# EAGLE board InputBrd (EAGLE 7.6.0)
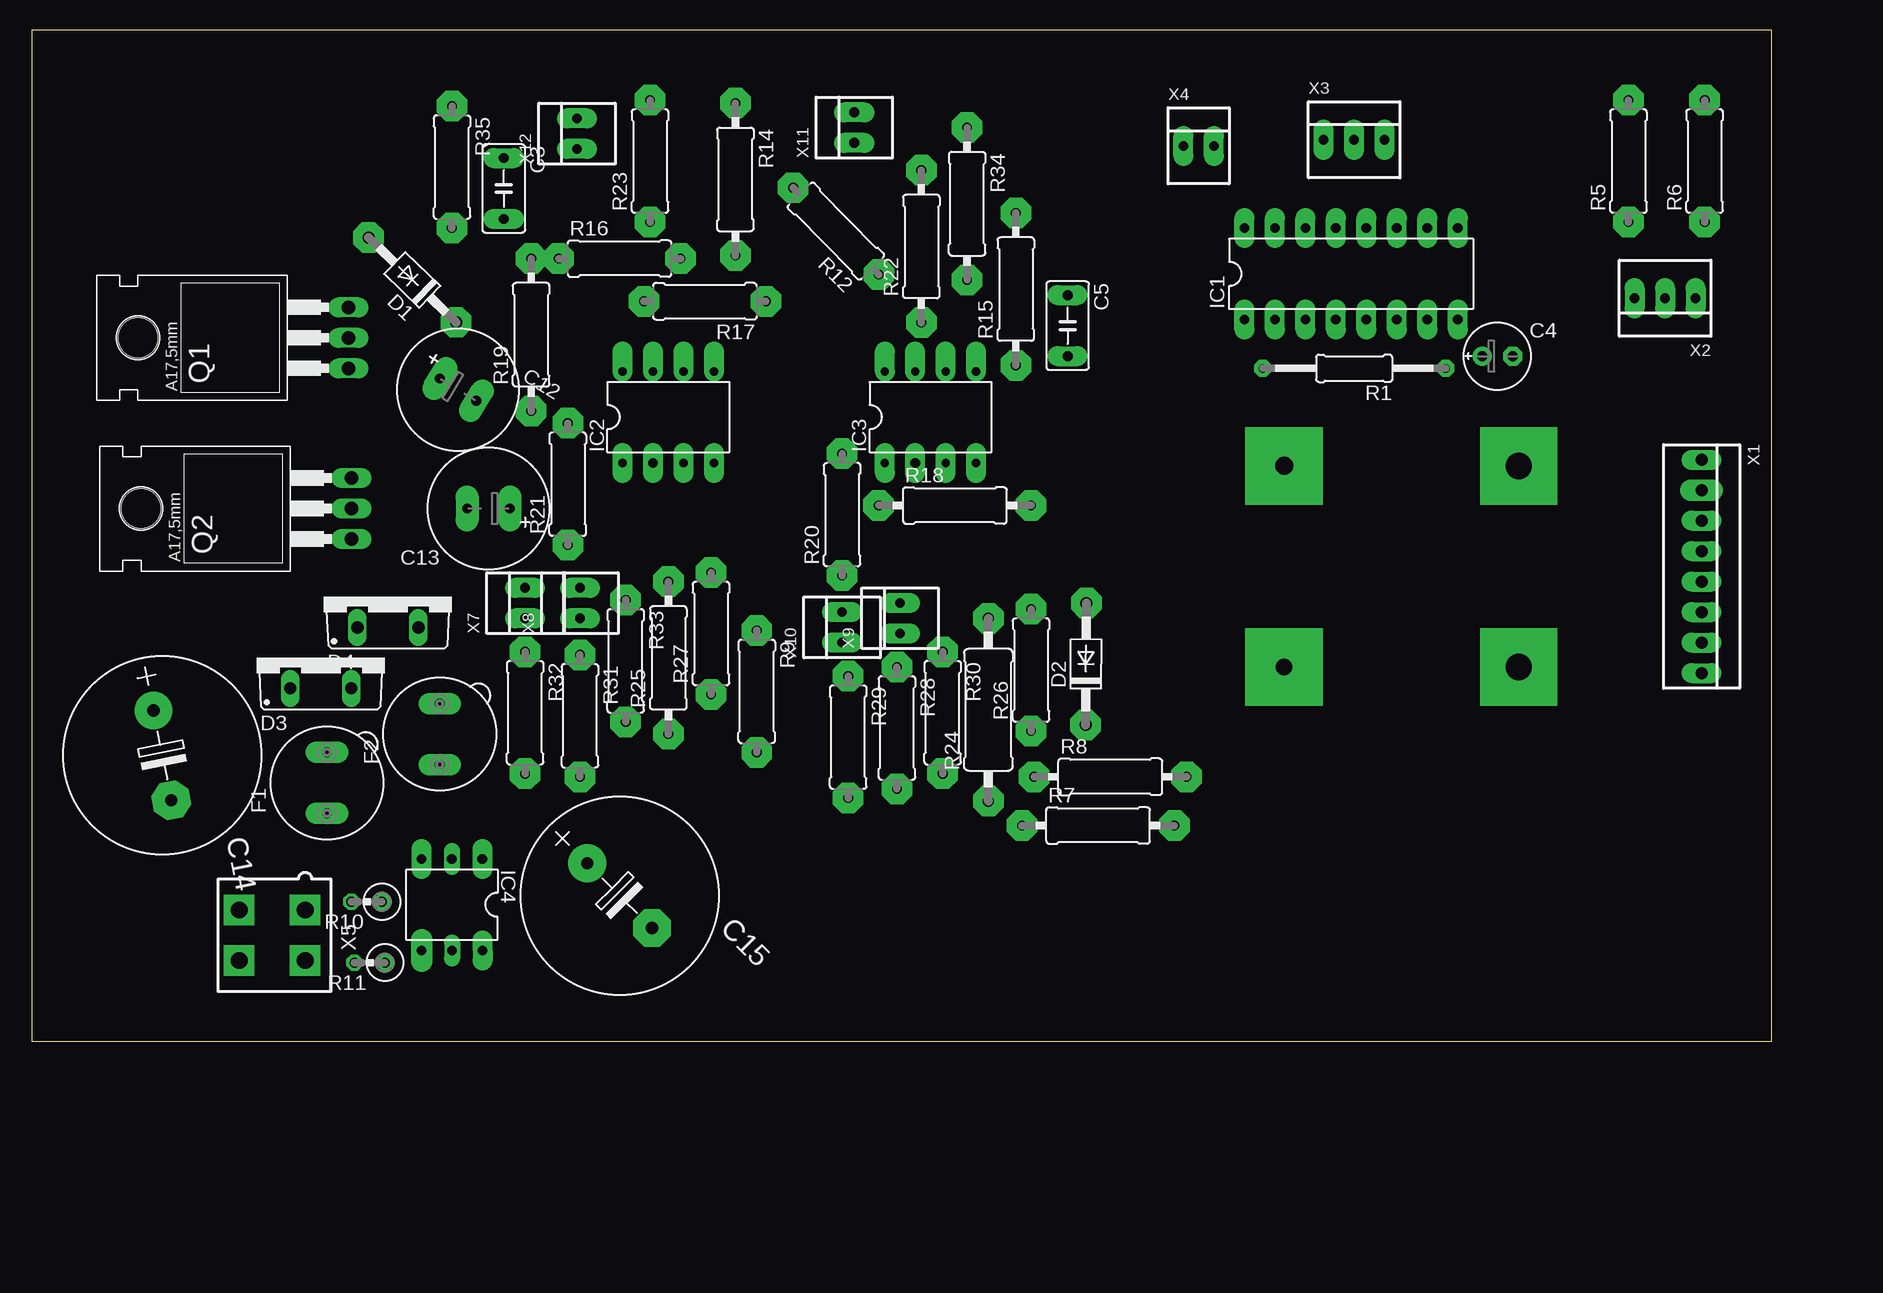
[diagram p0: board, top side]
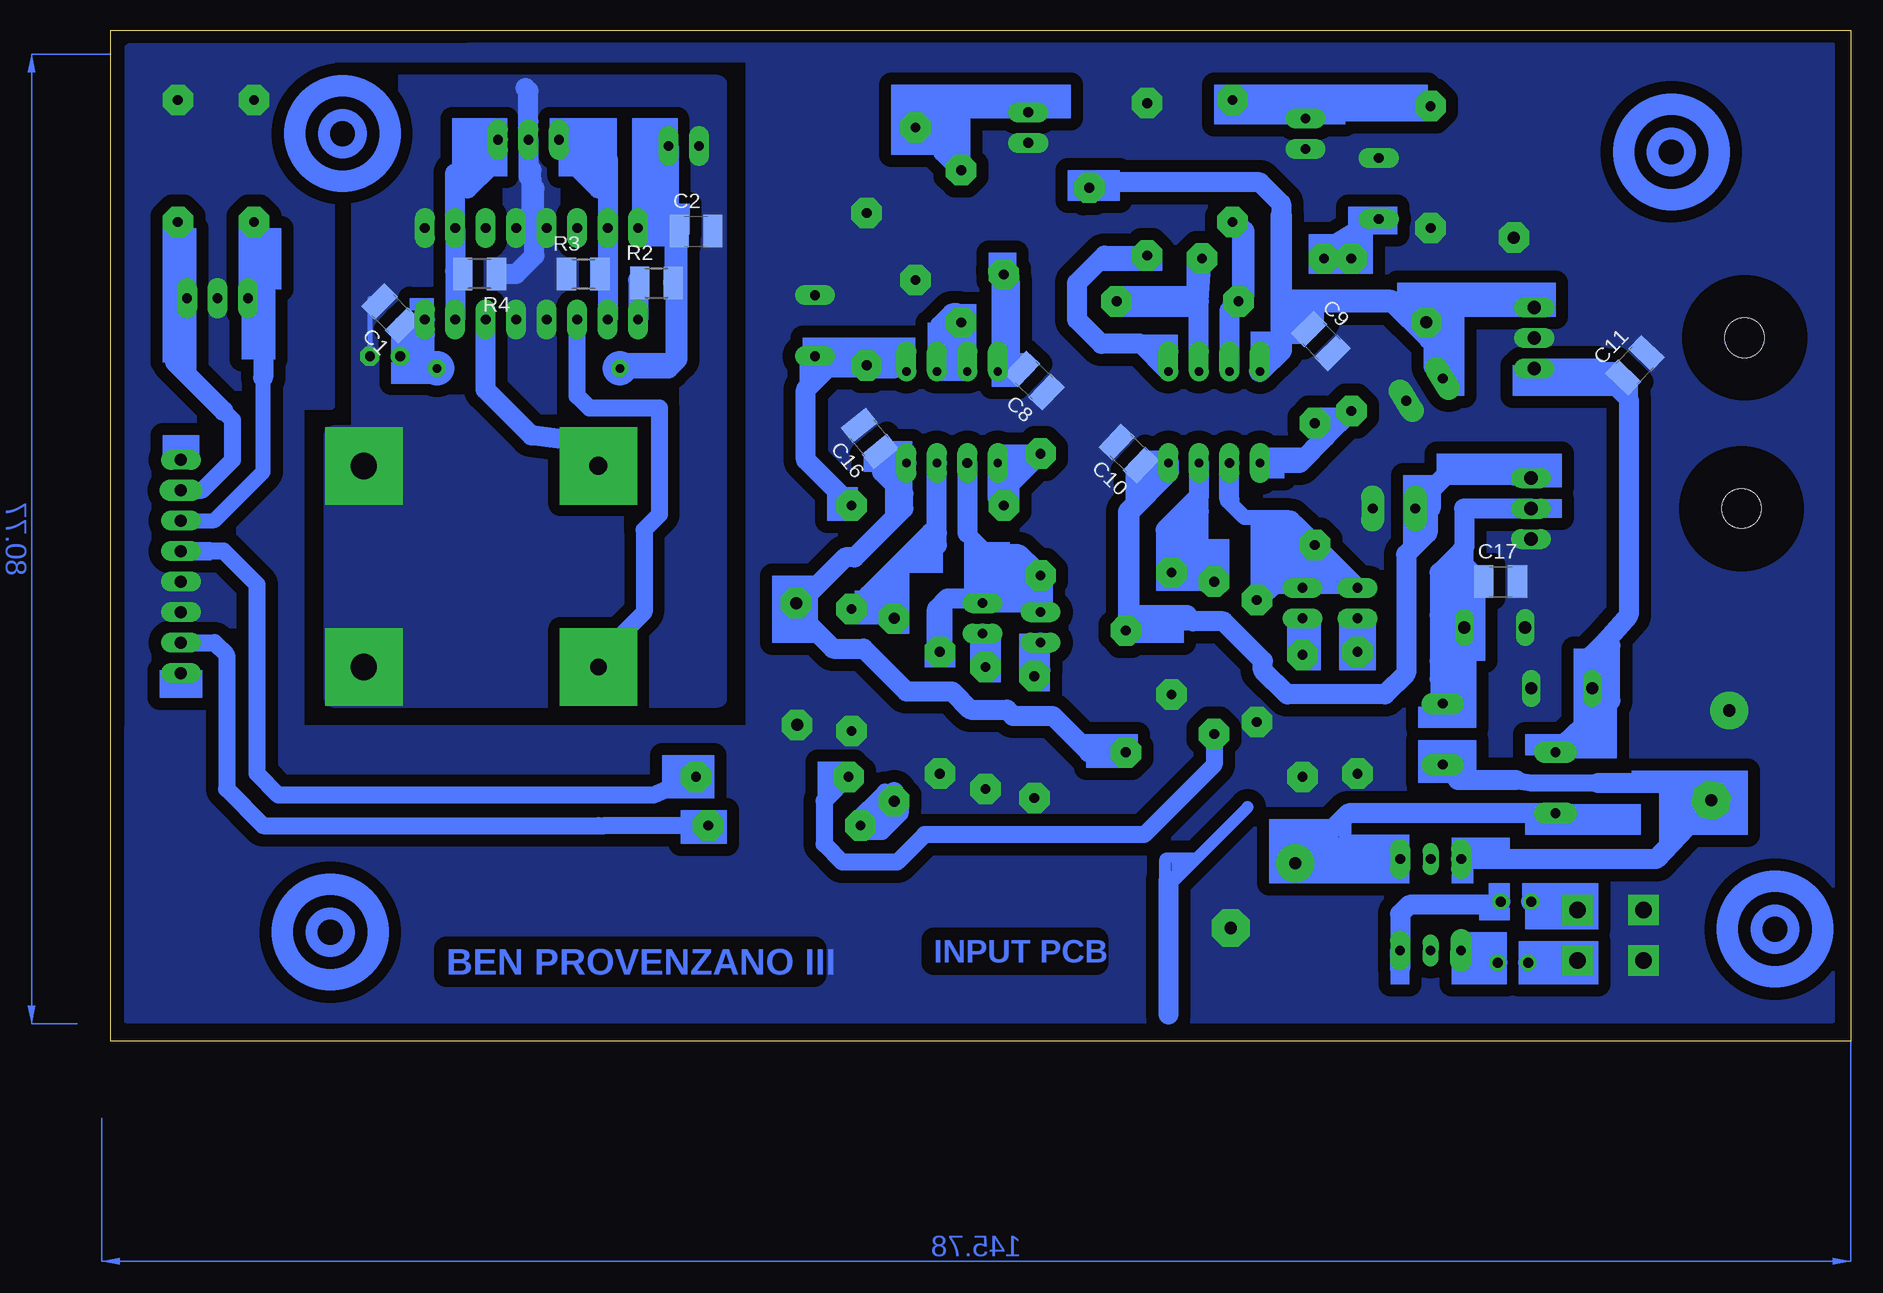
[diagram p1: board, bottom side, seen from below]

Size 145.01 x 84.25 mm. Coordinates in mm from the lower left corner, seen from the top.
Outline: 145.01,84.25 0,84.25 0,0 145.01,0 145.01,84.25
Copper layers (1*16): Top 0.035mm / dielectric 1.5mm / Bottom 0.035mm
Design rules "default": minimum track width 10mil, minimum drill 24mil, track to track 8mil, track to pad 8mil, pad to pad 8mil, via to via 8mil, smd to smd 8mil, copper to edge 40mil, drill to drill 8mil, minimum pad ring 10mil, minimum via ring 8mil, stop-mask expansion 4mil, vias tented up to drill 0mil, thermal gap 10mil

## Footprints (pad centres in the part's own frame; a part is rotated, then mirrored left to right if it is on the bottom)
C1210 = smd 1.6 x 2.7: 1 -1.4,0; 2 1.4,0
C050-035X075 = drill 0.813 pad 1.676 long: 1 -2.54,0; 2 2.54,0
E2,5-6E = drill 0.813 pad 1.575: + -1.27,0 | drill 0.813 pad 1.575 octagon: - 1.27,0
E3,5-10 = drill 0.813 pad 1.93 long: + -1.778,0; - 1.778,0
E7,5-16 = drill 1.016 pad 3.15: + -3.81,0 | drill 1.016 pad 3.15 octagon: - 3.81,0
DO41-10 = drill 1 pad 2.54 octagon: A 5.08,0; C -5.08,0
TO220ACS = drill 1.016 long: A 2.54,-2.54; C -2.54,-2.54
19560 = drill 0.813 pad 1.778 long: 1 -2.54,0; 2 2.54,0
DIL16 = drill 0.813 pad 1.676 long: 1 -8.89,-3.81; 2 -6.35,-3.81; 3 -3.81,-3.81; 4 -1.27,-3.81; 5 1.27,-3.81; 6 3.81,-3.81; 7 6.35,-3.81; 8 8.89,-3.81; 9 8.89,3.81; 10 6.35,3.81; 11 3.81,3.81; 12 1.27,3.81; 13 -1.27,3.81; 14 -3.81,3.81; 15 -6.35,3.81; 16 -8.89,3.81
DIL08 = drill 0.7 pad 1.676 long: 1 -3.81,-3.81; 3 1.27,-3.81; 4 3.81,-3.81 | drill 0.8 pad 1.676 long: 2 -1.27,-3.81 | drill 0.7 pad 1.676 offset: 5 3.81,3.81; 6 1.27,3.81; 7 -1.27,3.81; 8 -3.81,3.81
DIL06 = drill 0.813 pad 1.676 long: 1 -2.54,-3.81; 3 2.54,-3.81; 6 -2.54,3.81 | drill 0.813 long: 2 0,-3.81; 5 0,3.81 | drill 0.813 pad 1.778 long: 4 2.54,3.81
TO220 = drill 1.118 long: 1 -2.54,-6.35; 2 0,-6.35; 3 2.54,-6.35 | hole 3.302: 0,11.176
0207/15 = drill 0.7 pad 1.422 octagon: 1 -7.62,0; 2 7.62,0
R1210 = smd 1.6 x 2.7: 1 -1.4,0; 2 1.4,0
0309/10 = drill 0.813 pad 2.54 octagon: 1 -5.08,0; 2 5.08,0
0309/12 = drill 0.813 pad 2.54 octagon: 1 -6.35,0; 2 6.35,0
0309V = drill 0.813 octagon: 1 -1.27,0; 2 1.27,0
0411/15 = drill 0.914 pad 2.54 octagon: 1 -7.62,0; 2 7.62,0
22-23-2081 = drill 1 pad 1.676 long: 1 -8.89,0; 3 -3.81,0; 4 -1.27,0; 5 1.27,0; 6 3.81,0; 7 6.35,0; 8 8.89,0 | drill 1 pad 1.778 long: 2 -6.35,0
22-23-2031 = drill 0.8 pad 1.676 long: 1 -2.54,0; 2 0,0; 3 2.54,0
22-23-2021 = drill 0.8 pad 1.676 long: 1 -1.27,0; 2 1.27,0
5566-4 = drill 1.4 pad 2.54 square: 1 2.1,-2.75; 2 -2.1,-2.75; 3 2.1,2.75; 4 -2.1,2.75

## Placement (x,y rotation side)
C1  .1  [C1210]  121.65,60.63 135 bottom
C2  .1  [C1210]  96.25,67.49 0 bottom
C3  220pF  [C050-035X075]  39.35,71.04 270 top
C4  100uF  [E2,5-6E]  122.15,57.07 0 top
C5  220pF  [C050-035X075]  86.34,59.61 270 top
C8  100nF  [C1210]  68.05,55.04 136.3 bottom
C9  100nF  [C1210]  44.18,58.34 314.5 bottom
C10  100nF  [C1210]  60.18,48.95 136.3 bottom
C11  .1  [C1210]  18.01,56.31 46.1 bottom
C12  100uF  [E3,5-10]  35.54,54.28 328.7 top
C13  100uF  [E3,5-10]  38.08,44.37 180 top
C14  1800uF  [E7,5-16]  10.9,23.8 281.3 top
C15  1800uF  [E7,5-16]  49,12.12 315 top
C16  100nF  [C1210]  81.77,50.22 128.7 bottom
C17  .1  [C1210]  29.19,38.28 0 bottom
D1  1N4004  [DO41-10]  31.73,63.42 135.9 top
D2  1N4004  [DO41-10]  87.86,31.42 89.6 top
D3  33v  [TO220ACS]  24.11,31.93 0 top
D4  33v  [TO220ACS]  29.7,37.01 0 top
F1  [19560]  24.62,21.51 90 top
F2  [19560]  34.02,25.58 90 top
IC1  L293D  [DIL16]  109.96,63.93 0 top
IC2  TL072  [DIL08]  53.07,51.99 0 top
IC3  TL072  [DIL08]  74.91,51.99 0 top
IC4  [DIL06]  35.03,11.35 180.1 top
Q1  7815  [TO220]  20.05,58.6 90 top
Q2  7915  [TO220]  20.3,44.37 90 top
R1  0  [0207/15]  110.22,56.06 180 top
R2  10k  [R1210]  99.55,63.17 0 bottom
R3  10k  [R1210]  105.64,63.93 0 bottom
R4  10k  [R1210]  114.28,63.93 180 bottom
R5  DNP  [0309/10]  133.08,73.33 90 top
R6  DNP  [0309/10]  139.43,73.33 90 top
R7  0  [0309/12]  88.88,17.96 0 top
R8  0  [0309/12]  89.9,22.02 0 top
R9  0  [0309/10]  60.43,29.13 270 top
R10  0  [0309V]  27.92,11.61 180 top
R11  0  [0309V]  28.17,6.53 180 top
R12  0  [0309/10]  67.04,67.49 134.6 top
R14  0  [0309/12]  58.65,71.81 270 top
R15  11k5  [0309/12]  82.02,62.66 90 top
R16  11k5  [0309/10]  49,65.2 0 top
R17  11k5  [0309/10]  56.11,61.65 180 top
R18  1k1  [0309/12]  76.94,44.63 0 top
R19  1k1  [0309/12]  41.64,58.85 90 top
R20  11k5  [0309/10]  67.54,43.87 90 top
R21  11k5  [0309/10]  44.68,46.41 90 top
R22  118  [0309/12]  74.15,66.22 90 top
R23  118  [0309/10]  51.54,73.33 90 top
R24  1k  [0411/15]  79.74,27.61 90 top
R25  1k  [0309/12]  53.07,31.93 90 top
R26  930k  [0309/10]  83.29,30.91 90 top
R27  930k  [0309/10]  56.62,33.96 90 top
R28  11k5  [0309/10]  72.12,26.09 270 top
R29  11k5  [0309/10]  68.05,25.32 270 top
R30  11k5  [0309/10]  75.93,27.36 270 top
R31  11k5  [0309/10]  45.7,27.1 270 top
R32  11k5  [0309/10]  41.13,27.36 270 top
R33  11k5  [0309/10]  49.51,31.67 270 top
R34  100k  [0309/12]  77.96,69.77 270 top
R35  100k  [0309/10]  35.03,72.82 269.9 top
X1  ALPS  [22-23-2081]  139.17,39.55 270 top
X2  IN  [22-23-2031]  136.12,61.9 180 top
X3  IN  [22-23-2031]  110.22,75.11 0 top
X4  5V  [22-23-2021]  97.26,74.6 0 top
X5  AC  [5566-4]  20.05,8.81 90 top
X7  [22-23-2021]  41.13,36.5 90 top
X8  [22-23-2021]  45.7,36.5 90 top
X9  [22-23-2021]  72.37,35.23 90 top
X10  [22-23-2021]  67.54,34.47 90 top
X11  0 OUT  [22-23-2021]  68.56,76.12 90 top
X12  180 OUT  [22-23-2021]  45.45,75.62 90 top

## Library data of the parts
C1-C5 C8-C17 R1-R12 R14-R35 = resistor
D1-D4 = diode
F1 F2 = fuse; MPN: 56000001009; OC_FARNELL: 1185363; OC_NEWARK: 15P8392
IC1 = st-microelectronics; MPN: L293D; OC_FARNELL: 9589619; OC_NEWARK: 56P8249
IC2 IC3 = linear
IC4 = ic-package
Q1 Q2 = transistor-fet
X1 = con-molex; MF: MOLEX; MPN: 22-23-2081; OC_FARNELL: 1756826; OC_NEWARK: 01C7592
X2 X3 = con-molex; MF: MOLEX; MPN: 22-23-2031; OC_FARNELL: 1462950; OC_NEWARK: 30C0862
X4 X7-X12 = con-molex; MF: MOLEX; MPN: 22-23-2021; OC_FARNELL: 1462926; OC_NEWARK: 25C3832
X5 = con-molex; OC_FARNELL: unknown; OC_NEWARK: unknown

## Nets
AGND: C3.1 C5.1 C8.1 C9.2 C10.2 C11.2 C12.- C13.+ C14.+ C15.- C16.2 C17.2 D1.A D2.C D3.A D4.C Q1.2 Q2.1 R5.2 R6.2 R14.1 R15.2 R26.1 R27.1 R28.2 R29.2 R30.2 R31.2 R32.2 R33.2 R34.2 R35.2 X1.5 X1.6 X2.2 X5.3 X5.4 X11.1 X12.1
CCW_SUB: IC1.3
CW_SUB: IC1.6
GND: C1.2 C2.2 C4.- IC1.4 IC1.5 IC1.9 IC1.12 IC1.13 R3.1 R4.1 X3.2 X4.1
N$1: IC1.7 IC1.10 R4.2 X3.3
N$2: IC1.2 IC1.15 R3.2 X3.1
N$3: R6.1 X1.2 X2.1
N$4: R7.2 X1.7
N$5: R5.1 X1.3 X2.3
N$6: R7.1 R24.1
N$7: IC1.1 R2.1
N$8: C1.1 C4.+ IC1.8 R1.1
N$9: R8.2 X1.4
N$10: C11.1 D3.C F1.2 Q1.1
N$11: C2.1 IC1.16 R1.2 R2.2 X4.2
N$12: C17.1 D4.A F2.2 Q2.2
N$13: C16.1 D2.A IC3.4 R9.2
N$15: C8.2 IC3.8 R12.1
N$16: R11.2 X5.2
N$17: R10.2 X5.1
N$18: IC4.6 R10.1
N$19: IC4.4 R11.1
N$20: C15.+ F1.1 IC4.1
N$21: C14.- F2.1 IC4.3
N$23: C9.1 C12.+ D1.C IC2.8 Q1.3 R12.2
N$24: C10.1 C13.- IC2.4 Q2.3 R9.1
N$25: IC3.6 IC3.7 R22.1
N$26: IC2.5 R14.2
N$27: C5.2 IC3.5 R15.1 R18.2
N$28: IC2.6 R16.2 R17.1
N$29: IC2.7 R17.2 R23.1
N$30: C3.2 R16.1 R19.2
N$31: IC3.1 R18.1 R20.2
N$32: IC2.1 R19.1 R21.2
N$33: IC3.3 R24.2 R26.2
N$34: IC3.2 R20.1 R30.1 X9.2 X10.2
N$35: IC2.2 R21.1 R33.1 X7.2 X8.2
N$36: IC2.3 R25.2 R27.2
N$37: R31.1 X8.1
N$38: R32.1 X7.1
N$39: R29.1 X10.1
N$40: R28.1 X9.1
N$43: R22.2 R34.1 X11.2
N$44: R23.2 R35.1 X12.2
N$47: R8.1 R25.1

## Tracks (layer width: path | path; a pad name or v marks a point on that pad's centre or on a via)
AGND
  pour Bottom (isolate 1.016, no thermals): 143.49,22.28 100.82,22.28 100.82,24.05 129.27,24.05 129.27,53.01 126.73,53.01 126.73,81.97 89.64,81.97 89.64,82.98 120.38,82.73 143.49,82.73
  pour Bottom (isolate 1.016, no thermals): 143.74,1.7 1.5,1.7 1.5,82.98 91.93,82.98 91.93,26.09 143.74,26.09
CCW_SUB  (via drill 1.4 pad 6.45)
  Bottom 1.016: IC1.3 106.41,60.88
  Bottom 1.27: 104.37,31.93 v104.37,31.17
  Bottom 1.422: 104.37,31.93 100.56,35.74 100.56,42.6 99.29,43.87 99.29,52.76 105.14,52.76 106.15,53.77 IC1.3
CW_SUB  (via drill 1.5 pad 6.45)
  Bottom 1.016: 104.37,48.44 105.9,49.71
  Bottom 1.422: 104.37,48.44 v104.37,47.93
  Bottom 1.676: 105.9,49.71 106.15,49.96 109.96,50.47 113.77,54.28 IC1.6
GND  (via drill 2.2 pad 6.45)
  Bottom 0.406: C1.2 123.42,61.87 C4.-
  Bottom 1.676: X3.2 110.22,76.63 | X3.2 110.22,72.82 | 110.22,72.82 110.22,72.06 109.96,71.81 | 109.96,71.81 109.96,71.3 | 109.96,71.3 109.96,69.01 IC1.12 | R4.1 111.23,63.93 109.71,65.46 109.71,71.04 109.96,71.3 | 109.96,71.81 109.96,72.57 110.22,72.82 | X3.2 110.22,79.17 110.47,79.43
  other vias: 123.93,31.17 123.93,47.93
  pour Bottom (isolate 0.965, no thermals): 126.47,28.63 94.47,28.63 94.47,79.68 124.19,79.68 124.19,50.47 126.47,50.47
N$1
  Bottom 1.27: R4.2 116.31,64.19
  Bottom 1.676: IC1.7 116.31,64.19 IC1.10 116.31,71.04 | 116.31,71.04 116.31,72.31 | X3.3 113.52,75.11 113.52,72.82 115.3,71.04 116.31,71.04
N$2
  Bottom 1.27: R3.2 103.61,64.19
  Bottom 1.676: IC1.2 103.61,64.19 IC1.15 103.61,71.04 | X3.1 106.66,75.11 | 103.61,73.58 103.61,71.04 | 105.14,75.11 106.66,75.11 | 106.66,75.11 106.66,73.33 104.37,71.04 103.61,71.04
N$3
  Bottom 1.422: X1.2 137.39,45.9 134.85,48.44 134.85,51.74 135.62,52.5
  Bottom 1.676: X2.1 139.04,61.52 | 139.04,61.52 139.68,60.88 139.68,56.57 135.62,52.5 | R6.1 139.43,61.9 139.04,61.52
N$4
  Bottom 1.422: X1.7 136.38,33.2 135.36,32.18 135.36,21.01 132.31,17.96 104.37,17.96 103.87,17.96 R7.2
N$5
  Bottom 1.27: X1.3 136.38,43.36 132.31,47.42 132.31,55.3
  Bottom 1.676: 132.31,55.3 132.31,60.63 X2.3 133.08,62.41 R5.1
N$6
  Bottom 1.422: 79.74,20.75 79.23,20.24 79.23,18.97 80.75,17.45 82.53,17.45 83.04,17.96 83.04,18.21 80.5,20.75 79.74,20.75 | 79.74,20.75 81.51,18.97 81.51,18.21 81.77,17.96 R7.1
  Bottom 1.676: 79.74,20.75 R24.1
N$7
  Bottom 1.676: R2.1 101.07,63.42 IC1.1
N$8
  Bottom 1.676: R1.1 118.85,57.07 IC1.8 118.85,58.85 119.87,57.84 | C4.+ 119.87,57.84 | C1.1 119.87,59.11 119.87,57.84
N$9
  Bottom 1.422: R8.2 99.8,20.5 131.04,20.5 132.82,22.28 132.82,38.02 135.62,40.82 X1.4
N$10
  Bottom 1.27: C11.1 19.41,54.88 19.41,54.41
  Bottom 1.676: Q1.1 21.06,56.06 19.41,54.41 18.52,53.52 18.52,35.48 20.43,33.33 | 20.43,33.33 21.57,32.18 D3.C | F1.2 20.05,28.37 20.05,32.94 20.43,33.33
N$11
  Bottom 1.27: C2.1 98.31,67.55 IC1.16
  Bottom 1.676: 98.02,66.73 97.77,66.98 97.9,67.36 C2.1 | R2.2 98.02,63.8 98.02,66.73 | R1.2 98.53,56.06 97.77,56.82 97.77,66.47 98.02,66.73 | X4.2 98.53,67.78 98.31,67.55
N$12
  Bottom 1.27: C17.1 32.36,40.05 32.36,40.95
  Bottom 1.676: Q2.2 32.24,44.37 32.24,41.07 32.36,40.95 34.27,39.04 34.27,35.48 | 34.27,35.48 34.27,31.67 | 34.27,31.67 34.27,30.15 | D4.A 34.27,35.48 | F2.2 33.76,28.37 33.76,31.67 34.27,31.67
N$13
  Bottom 1.676: IC3.4 79.41,48.87 C16.1 | IC3.4 78.97,48.18 | IC3.4 78.97,47.93 | 86.85,37.26 83.8,40.31 83.04,40.31 78.97,44.37 78.97,45.64 80.75,47.42 80.75,48.18 IC3.4 | 86.85,37.26 87.1,37.01 87.1,34.98 84.82,32.69 82.28,32.69 78.72,29.13 74.91,29.13 73.39,27.61 70.34,27.61 69.83,27.1 66.53,27.1 63.48,24.05 R9.2 | D2.A 88.41,37.26 86.85,37.26
N$14
  Bottom 1.016: 56.88,13.39 56.37,13.39 50.27,19.48
  Bottom 1.676: 56.88,13.39 56.88,2.21
N$15
  Bottom 1.676: C8.2 70.11,57.05 | 70.11,57.05 70.23,57.18 | 70.23,57.18 70.43,57.38 | IC3.8 70.23,56.67 70.23,57.18 | R12.1 70.11,63.37 70.11,57.05
N$16
  Bottom 1.676: R11.2 26.72,6.71 X5.2
N$17
  Bottom 1.676: R10.2 25.96,10.91 X5.1
N$18
  Bottom 1.676: R10.1 29.44,11.35 36.81,11.35 37.57,10.59 37.57,6.02 37.58,6.03 IC4.6
N$19
  Bottom 1.676: R11.1 30.97,6.53 31.98,7.54 IC4.4
N$20
  Bottom 1.676: F1.1 41.89,18.97 44.94,15.93 45.62,15.37 | 45.62,15.37 C15.+ | IC4.1 37.57,15.94 38.14,15.37 45.62,15.37
N$21
  Bottom 1.422: 21.06,21.51 26.65,21.51 28.43,21.77
  Bottom 1.676: F2.1 32.75,21.77 28.43,21.77 27.92,21.77 | 21.06,21.51 15.73,21.51 14.71,20.5 11.16,20.5 10.9,20.24 C14.- 11.92,19.74 16.24,15.16 IC4.3
N$22
  Bottom 1.016: 56.88,13.64 57.13,13.39 57.13,15.16
N$23
  Bottom 1.676: 47.48,68.76 47.48,69.77 49.26,71.55 61.7,71.55 62.09,71.16 R12.2 | 47.22,61.14 46.97,60.88 46.7,60.88 C9.1 | 38.33,61.65 35.16,58.47 | 35.16,58.47 34.52,57.84 | D1.C 34.78,60.38 34.78,59.36 | 34.78,59.36 35.16,58.47 | Q1.3 34.52,61.14 34.52,58.85 34.78,59.36 | 34.78,59.36 34.78,56.21 C12.+
  Bottom 1.778: 46.72,61.65 47.22,61.14 47.48,60.88 | 47.48,60.88 47.48,57.58 IC2.8 | 47.48,60.88 47.48,68.76
  Bottom 1.93: 38.33,61.65 46.72,61.65 | 35.54,60.63 D1.C
N$24
  Bottom 1.676: C10.1 58.15,46.96 56.88,47.42 | Q2.3 28.43,47.17 33.76,47.17 35.03,45.9 35.03,44.37 | 59.67,35.48 55.35,35.48 54.84,34.98 52.3,34.98 49,31.67 49,30.91 46.97,28.88 38.84,28.88 37.06,30.66 37.06,40.56 35.29,42.34 35.29,44.12 35.03,44.37 | 59.67,35.48 60.18,35.48 | C13.- 35.03,44.37 | R9.1 59.67,34.98 59.67,35.48
  Bottom 1.778: IC2.4 56.88,47.42 60.18,44.12 60.18,35.48
N$25
  Bottom 1.676: IC3.6 IC3.7 74.15,56.31 74.15,60.38 74.4,60.63 74.91,60.63 75.93,59.61 75.93,57.33 73.77,59.49 | R22.1 73.77,59.49 | 73.77,59.49 74.4,59.36
N$26
  Bottom 1.676: IC2.5 59.16,58.09 62.46,58.09 64.5,60.12 64.5,63.17 62.21,65.46 R14.2
N$27
  Bottom 1.676: IC3.5 79.74,56.82 | 84.31,57.07 79.99,57.07 79.74,56.82 | 84.31,57.07 C5.2 | 79.74,56.82 79.74,56.06 81.77,56.06 R15.1 | R18.2 87.1,48.44 87.1,54.28 84.31,57.07
N$28
  Bottom 1.676: IC2.6 54.34,61.65 | 54.34,61.65 R16.2 | R17.1 54.34,61.65
N$29
  Bottom 1.676: IC2.7 51.8,60.88 R17.2 50.53,62.15 50.53,67.49 51.29,68.25 R23.1
N$30
  Bottom 1.778: 43.16,65.2 43.16,66.22 C3.2 | R19.2 43.16,65.2 | 43.16,65.2 R16.1
N$31
  Bottom 1.676: IC3.1 71.1,45.14 R18.1 70.59,45.9 R20.2
N$32
  Bottom 1.676: IC2.1 45.95,48.18 43.79,50.34 | 43.79,50.34 R19.1 | R21.2 43.79,50.6 43.79,50.34
N$33
  Bottom 1.676: 76.18,41.33 76.18,42.34 | 76.18,42.34 IC3.3 | 76.18,42.34 76.69,42.34 81.88,37.15 81.88,35.89 | R26.2 83.04,36.25 81.88,35.89 | 81.88,35.89 R24.2 79.74,35.74 79.99,36.5
N$34
  Bottom 1.27: 73.64,42.34 71.86,40.56 69.32,40.56
  Bottom 1.676: IC3.2 73.64,42.34 | R20.1 68.69,39.93 | 68.69,39.93 69.32,40.56 70.08,40.56 70.08,38.79 71.99,36.88 | X9.2 71.99,36.88 | X10.2 69.07,37.26 69.07,39.55 68.69,39.93 | R30.1 76.18,32.69 76.18,35.99 75.29,36.88 71.99,36.88
N$35
  Bottom 1.27: 46.08,42.72 46.97,43.61 50.53,43.61 51.8,44.88 51.8,45.14
  Bottom 1.676: 51.8,45.14 IC2.2 | 46.72,43.36 46.08,42.72 R21.1 44.3,40.95 | X7.2 44.3,40.95 | R33.1 45.06,40.69 | 45.06,40.69 44.81,40.95 44.3,40.95 | X8.2 45.06,38.41 45.06,40.69
N$36
  Bottom 1.27: 54.34,44.12 54.46,44.25 54.46,45.26
  Bottom 1.422: 54.34,39.55 R25.2
  Bottom 1.676: R27.2 54.34,39.55 54.34,44.12 | IC2.3 54.34,45.39 54.46,45.26 57.13,42.6
N$37
  Bottom 1.676: R31.1 X8.1
N$38
  Bottom 1.676: R32.1 X7.1
N$39
  Bottom 1.676: R29.1 67.54,30.91 X10.1
N$40
  Bottom 1.676: R28.1 72.37,31.42 X9.1
N$42  (via drill 0.6)
  other vias: 8.87,58.6
N$43
  Bottom 1.676: R34.1 75.67,78.16 | 75.67,78.16 68.05,78.16 67.8,77.9 67.8,77.39 X11.2 | R22.2 75.67,74.09 75.67,78.16
N$44
  Bottom 1.676: R23.2 51.29,78.16 47.48,78.16 | X12.2 45.19,77.14 45.19,78.16
  Bottom 1.93: R35.1 36.37,78.16 45.19,78.16 47.48,78.16 47.99,78.16 47.73,77.9
N$45  (via drill 0.6)
  other vias: 9.12,44.37
N$47
  Bottom 1.422: R8.1 85.58,19.99 85.58,16.43 84.05,14.91 79.48,14.91 77.2,17.2 58.91,17.2 53.07,23.04 R25.1
(copper drawn outside any net)
  shapes: Bottom area x307, Bottom circle x10

## Text on the board
Bottom: INPUT PCB | BEN PROVENZANO III